# Altium PCB BEAR4.PcbDoc (part 1 of 3)
Units mm, origin at the board's own origin, x right, y up, seen from the top; angles counter-clockwise.
Board outline 83.43 x 40.25 mm, 4 copper layers (Top Layer, Layer 1, Layer 2, Bottom Layer), stack 0.8 mm thick; 156 components, 110 nets, 501 pads, 382 vias.
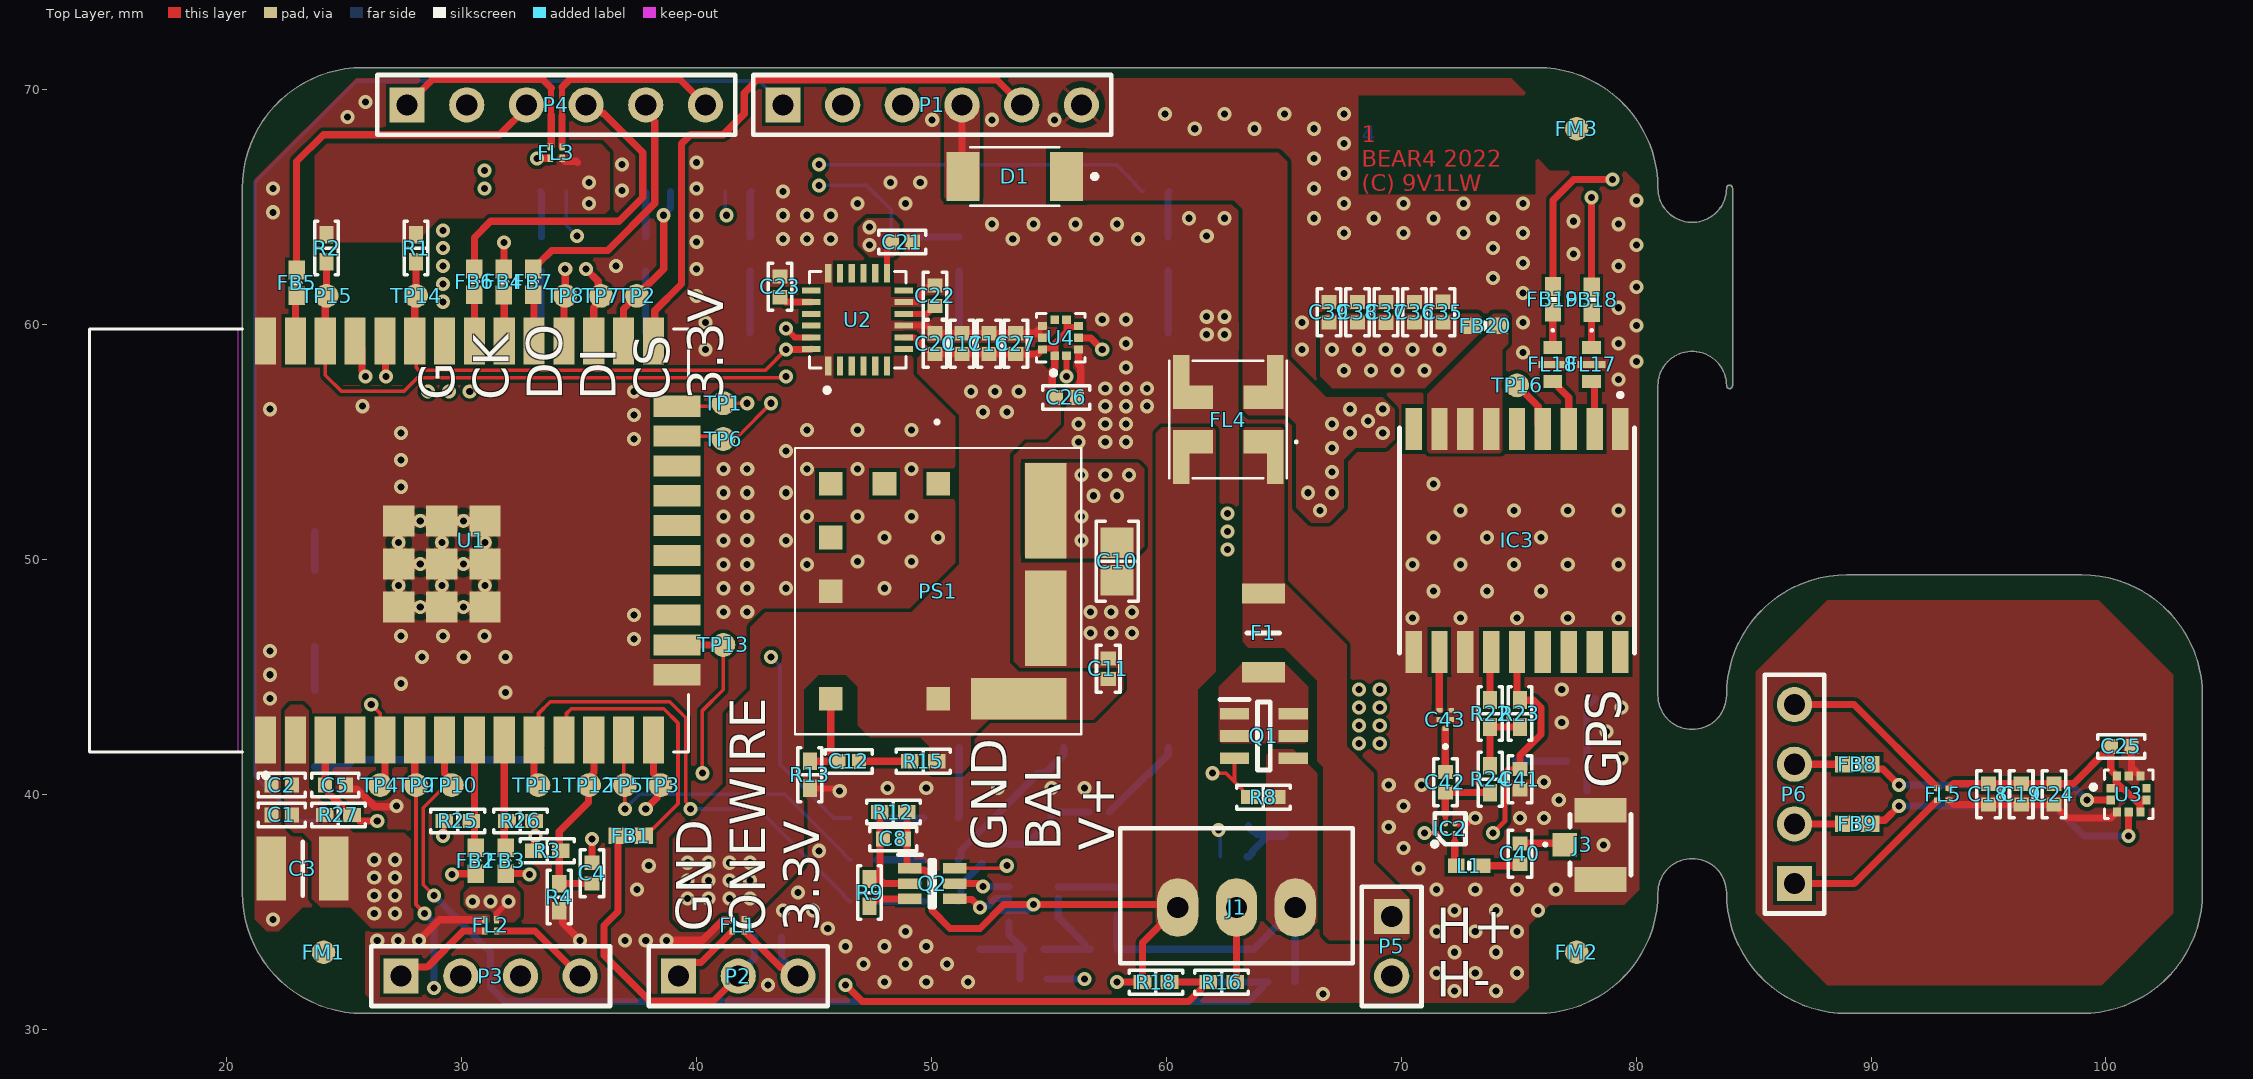
[diagram p0: Top Layer view]
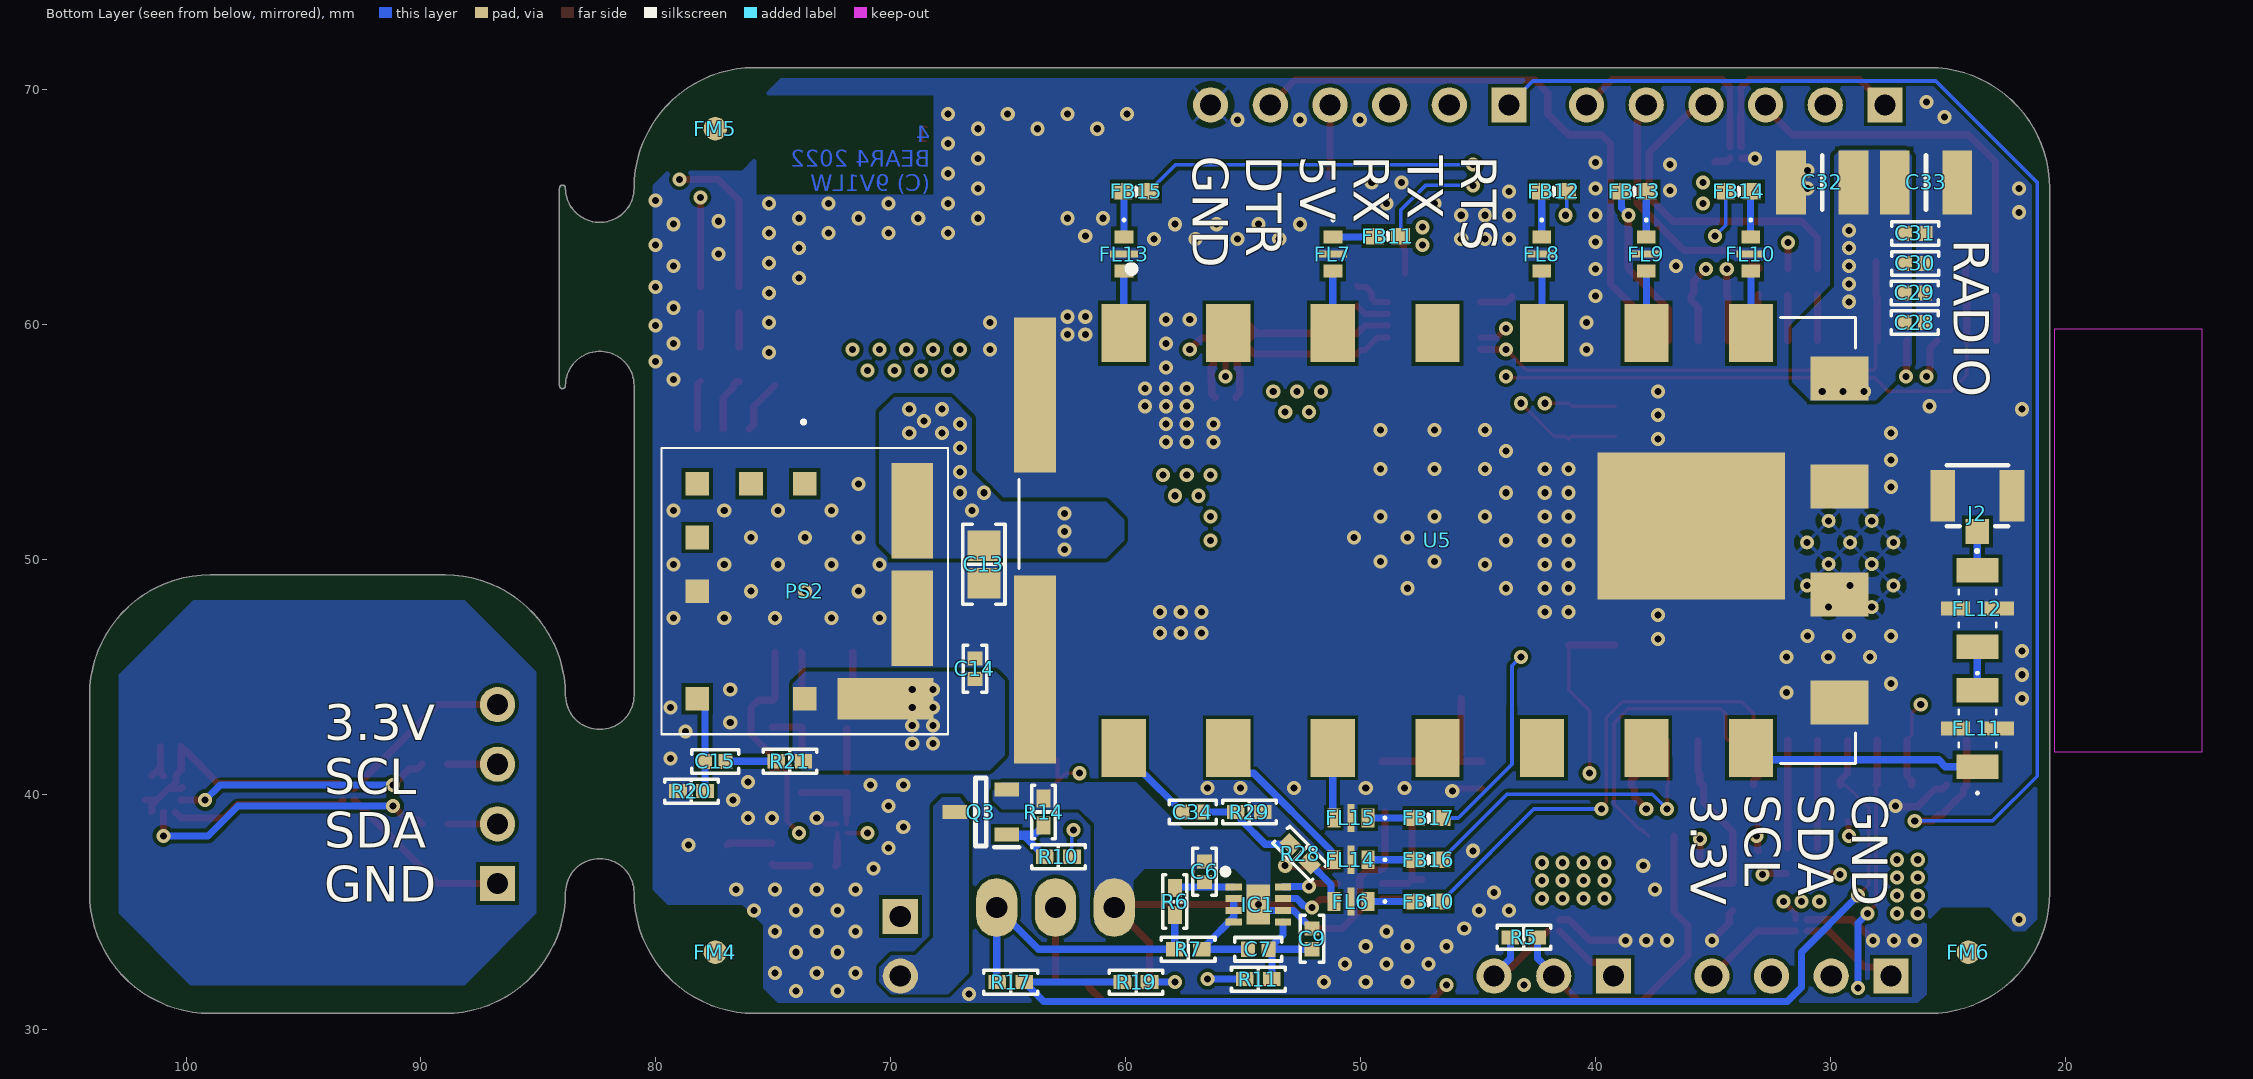
[diagram p1: Bottom Layer view, seen from below]
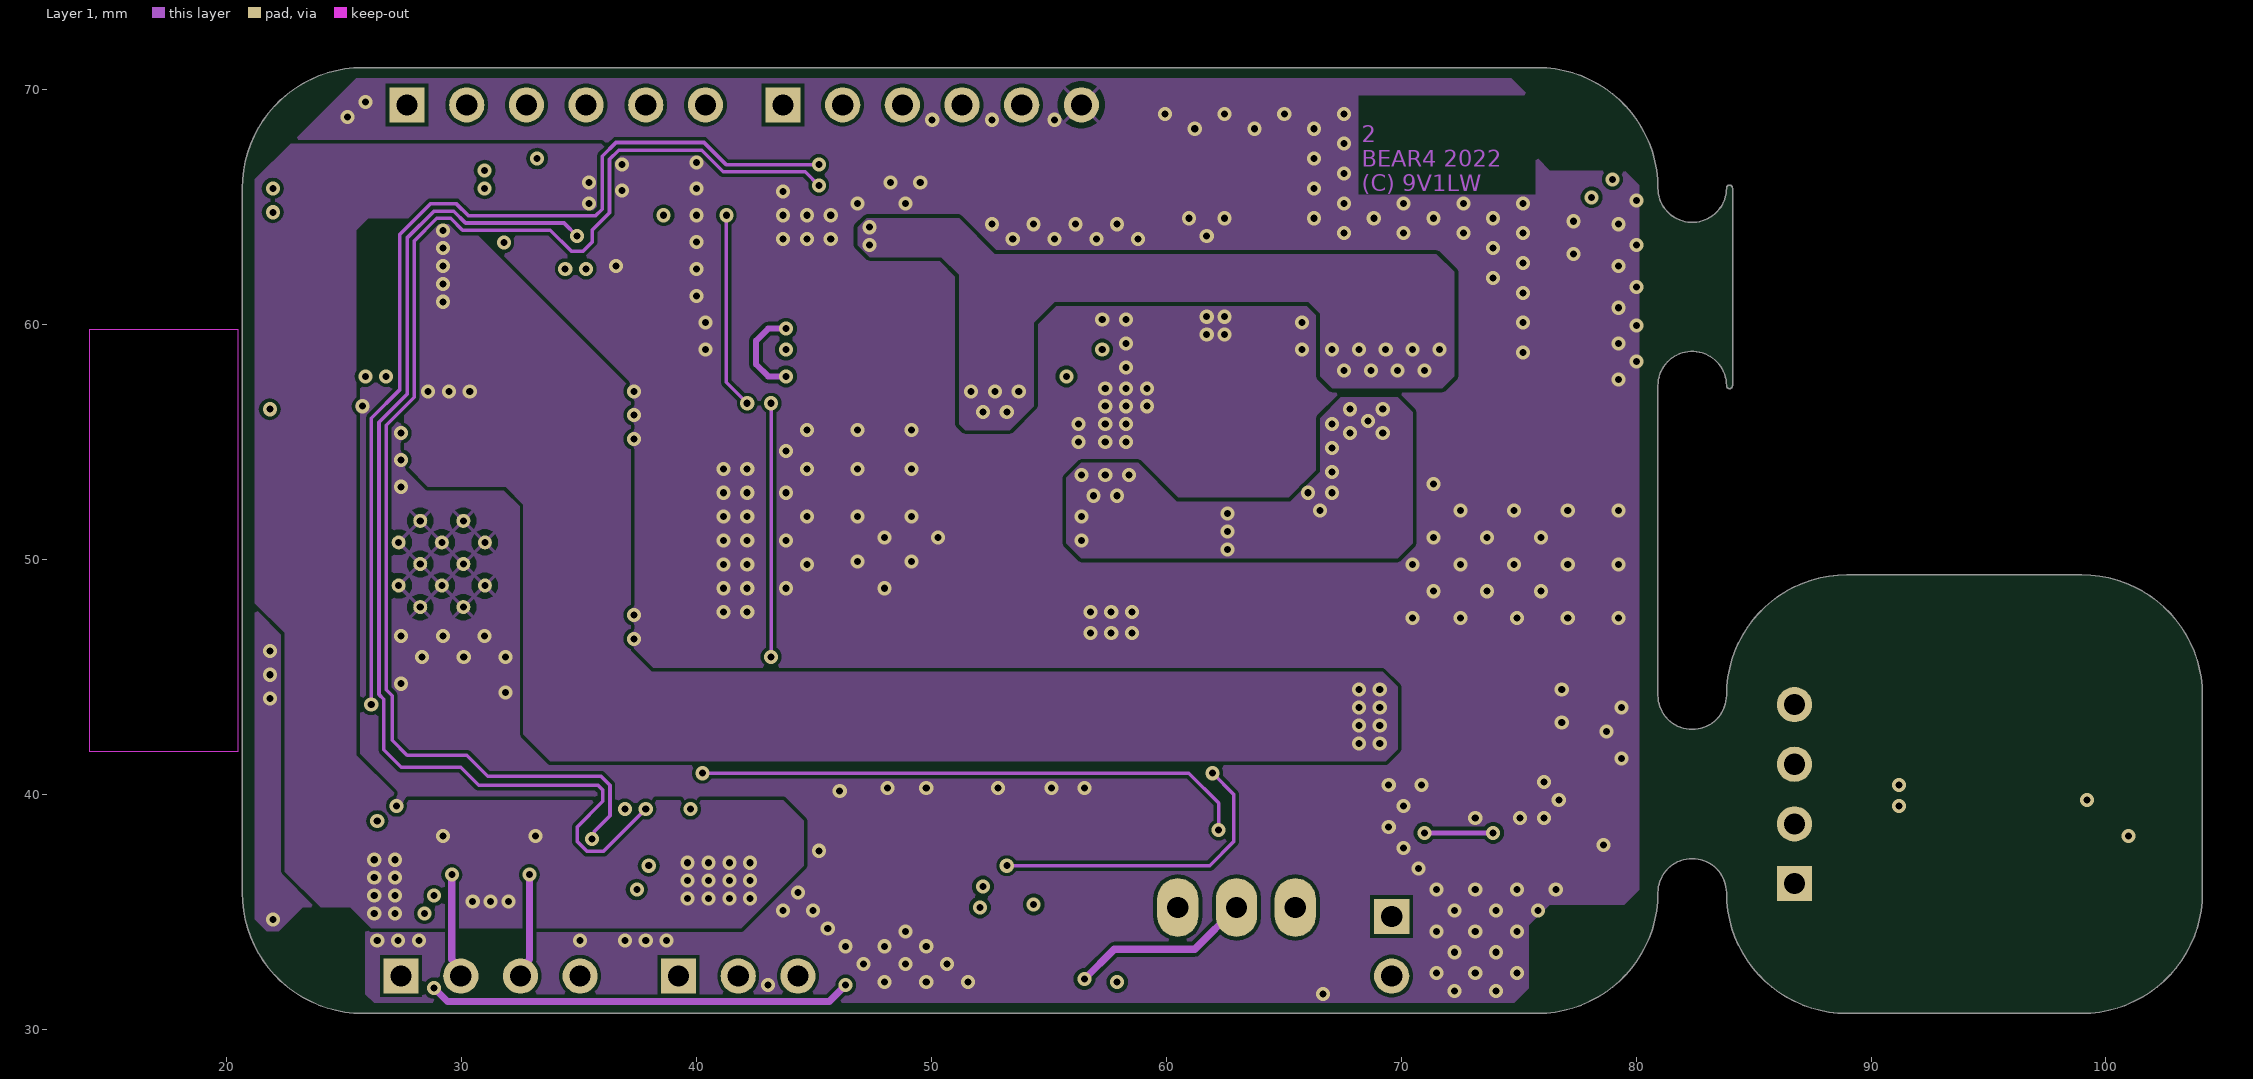
[diagram p2: Layer 1]
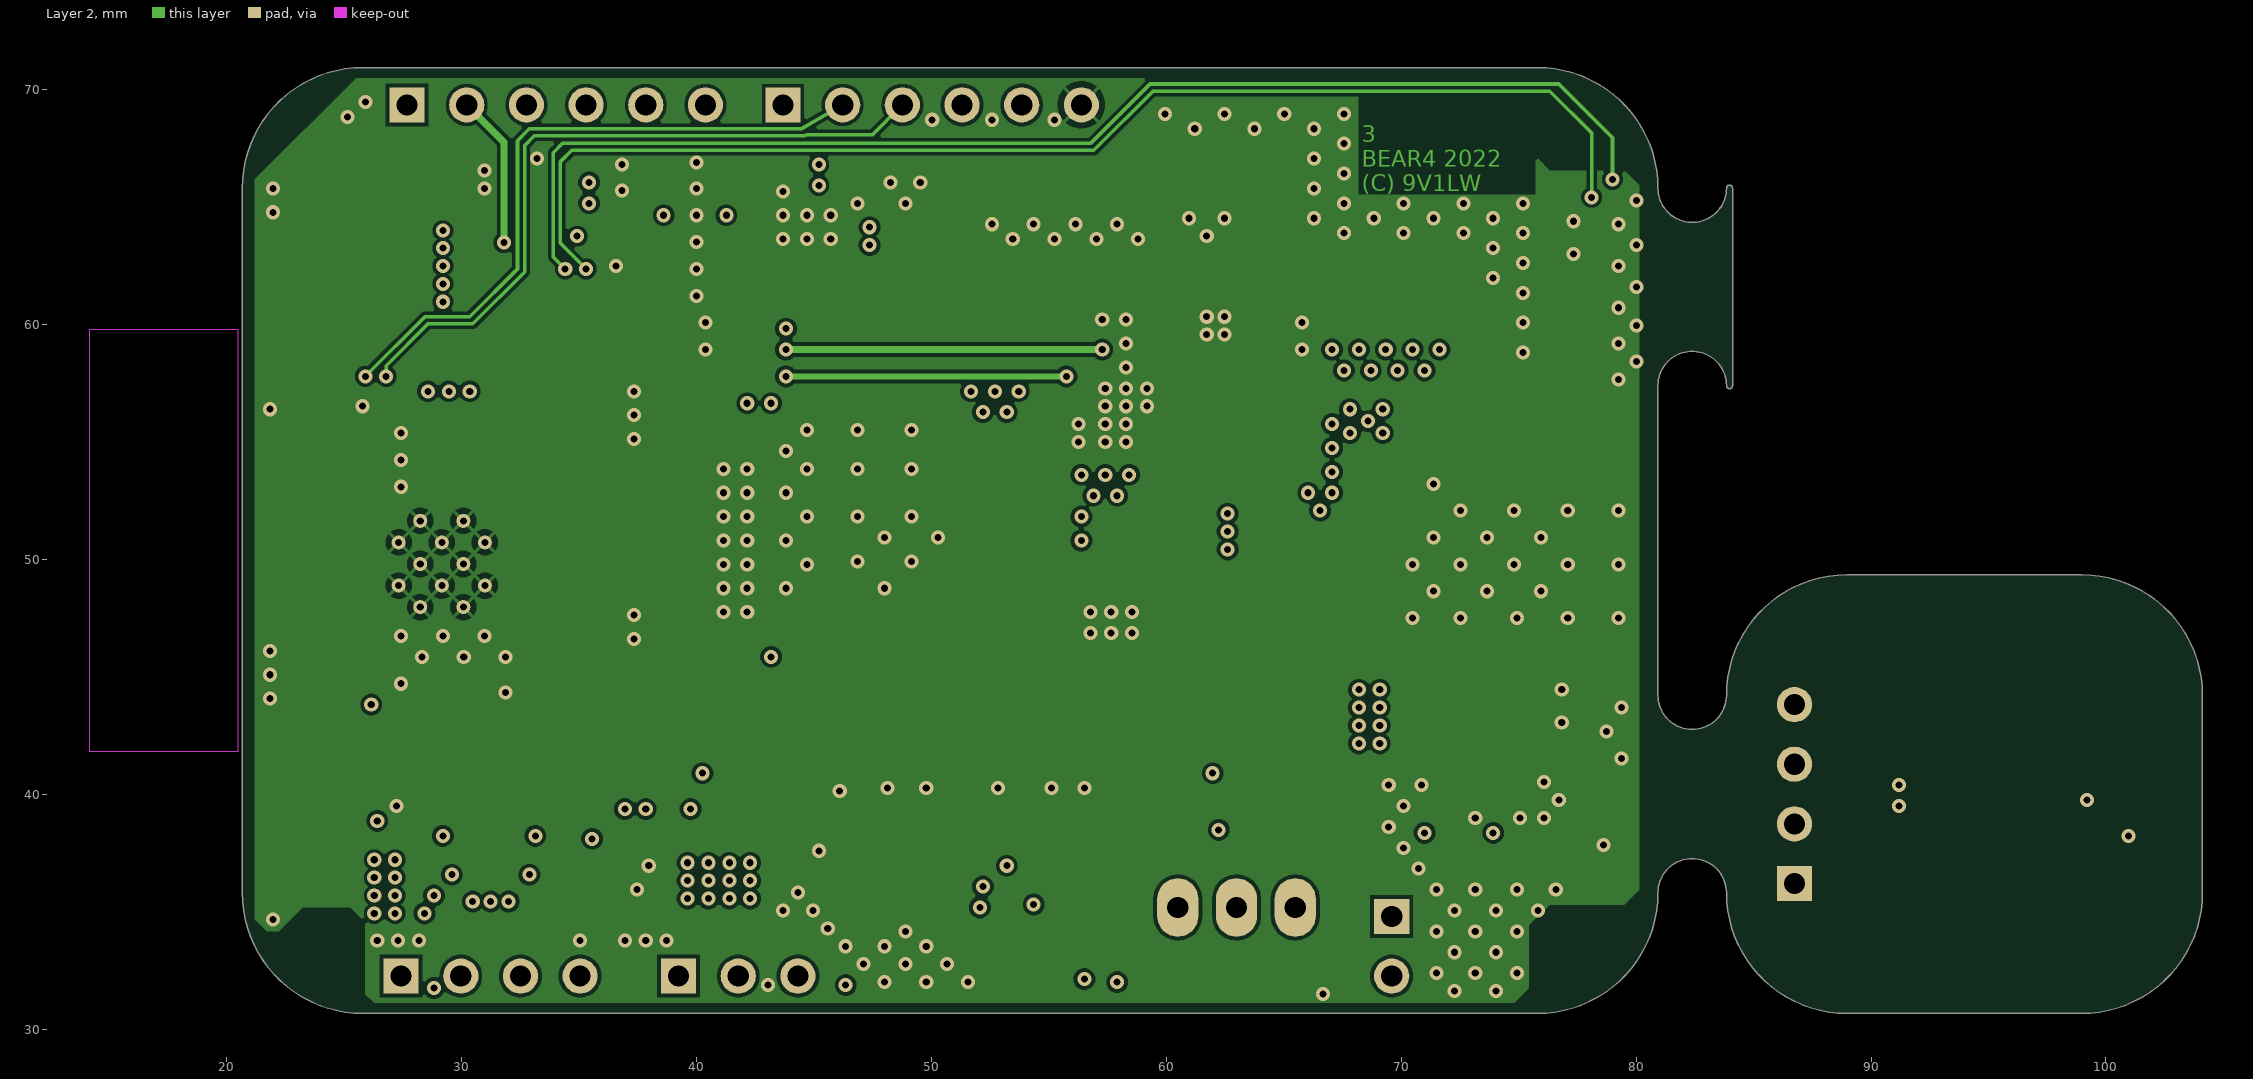
[diagram p3: Layer 2]

## Layer stack, top to bottom
Top Solder: solder mask 0.0102, Solder Resist, Dk 3.5
Top Layer: signal copper 0.035
Dielectric 2: prepreg 0.18, PP-023, Dk 4.29
Layer 1: signal copper 0.035
Dielectric 1: core 0.3, Core-034, Dk 4.6
Layer 2: signal copper 0.035
Dielectric 3: prepreg 0.18, PP-023, Dk 4.29
Bottom Layer: signal copper 0.035
Bottom Solder: solder mask 0.0102, Solder Resist, Dk 3.5

## Board outline
25.8,30.673 cw(c25.8,35.8) 20.673,35.8 20.673,65.8 cw(c25.8,65.8) 25.8,70.927 75.8,70.927 cw(c75.8,65.8) 80.927,65.8 ccw(c82.388,65.8) 83.848,65.8 cw(c83.975,65.8) 84.102,65.8 84.102,57.39 cw(c83.975,57.39) 83.848,57.39 ccw(c82.388,57.39) 80.927,57.39 80.927,44.215 ccw(c82.388,44.215) 83.848,44.212 ccw(c83.816,44.212) 83.848,44.213 cw(c88.975,44.213) 88.975,49.34 98.975,49.34 cw(c98.975,44.212) 104.102,44.212 104.102,35.8 cw(c98.975,35.8) 98.975,30.673 88.975,30.673 cw(c88.975,35.8) 83.848,35.8 cw(c83.975,35.8) 83.848,35.802 ccw(c84.005,35.803) 83.848,35.8 83.848,35.806 cw(c82.386,35.803) 83.848,35.803 ccw(c83.975,35.803) 83.848,35.802 83.848,35.806 ccw(c82.387,35.803) 80.927,35.803 80.927,35.8 ccw(c80.855,35.8) 80.927,35.801 ccw(c80.808,35.803) 80.927,35.803 80.927,35.8 cw(c75.8,35.8) 75.8,30.673

## Design rules (kind name [scope] priority, off if disabled: settings)
BoardOutlineClearance [(NOT OnLayer('Top Overlay')) AND (NOT OnLayer('Bottom Overlay'))] p1: gap=0.35 ignorepadtopadclearanceinfootprint=FALSE
Clearance [All] p1: gap=0.152 ignorepadtopadclearanceinfootprint=TRUE
ComponentClearance ComponentClearance_1 [InComponent('U5') OR InComponent('FL11') OR InComponent('FL12')] p1: gap=0 collisioncheckmode=3 verticalgap=0.254 showdistances=FALSE donotcheckwithout3dbody=TRUE
ComponentClearance [All] p2: gap=0.254 collisioncheckmode=3 verticalgap=0.254 showdistances=FALSE
HoleSize [All] p1: absolutevalues=TRUE maxlimit=6.3 minlimit=0.3 maxpercent=80.000 minpercent=20.000
MinimumAnnularRing [All] p1: minimumring=0.15
MinimumSolderMaskSliver [All] p1: minsoldermaskwidth=0.002
PlaneClearance [All] p1: clearance=1
PlaneConnect [All] p1: pad.planeconnectstyle=Relief pad.reliefexpansion=0.508 pad.reliefentries=4 pad.reliefconductorwidth=0.152 pad.reliefairgap=0.254 via.planeconnectstyle=Direct via.reliefexpansion=0.508 via.reliefentries=4 via.reliefconductorwidth=0.152 via.reliefairgap=0.254
PolygonConnect PolygonConnect_1 [InNet('RAW_PWR') OR InNet('BATT_GND') OR InNet('NetP5_2') OR InNet('BATT_C2') OR InNet('BATT_PROTECTED')] p1: connectstyle=Direct reliefconductorwidth=0.152 reliefentries=4 polygonreliefangle="45 Angle" airgapwidth=0.254
PolygonConnect [All] p2: thpad.connectstyle=Relief thpad.reliefconductorwidth=0.152 thpad.reliefentries=4 thpad.polygonreliefangle="45 Angle" thpad.airgapwidth=0.254 smdpad.connectstyle=Direct smdpad.reliefconductorwidth=0.152 smdpad.reliefentries=4 smdpad.polygonreliefangle="90 Angle" smdpad.airgapwidth=0.254 via.connectstyle=Direct via.reliefconductorwidth=0.254 via.reliefentries=4 via.polygonreliefangle="90 Angle" via.airgapwidth=0.254
RoutingCorners RoutingCorners_1 [InNetClass('Z50Ohm')] p1: cornerstyle=Round minsetback=2.54 maxsetback=2.54
RoutingCorners [All] p2: cornerstyle=45-Degree minsetback=2.54 maxsetback=2.54
RoutingVias [All] p1: holewidth=0.3 width=0.6 viastyle="Through Hole" minholewidth=0.3 minwidth=0.6 maxholewidth=0.3 maxwidth=0.6
SilkToSilkClearance [All] p1: silktosilkclearance=0
SilkToSolderMaskClearance [IsPad] p1: minsilkscreentomaskgap=0 clearancetoexposedcopper=TRUE
SolderMaskExpansion SolderMaskExpansion_1 [IsVia] p1: expansion=0.102 istentingtop=TRUE
SolderMaskExpansion [All] p2: expansion=0.102 istentingtop=FALSE
UnRoutedNet [All] p1: checkbadconnections=TRUE
Width Width_1 [InNetClass('Z50Ohm')] p1: maxlimit=0.318 minlimit=0.152 preferedwidth=0.318 toplayer_minwidth=0.318 midlayer1_maxwidth=0.152 midlayer1_prefwidth=0.152 midlayer2_maxwidth=0.152 midlayer2_prefwidth=0.152 bottomlayer_minwidth=0.318 impedanceprofiledriven=TRUE impedanceprofileid={03A53C15-A395-4E3E-AA58-8DE9AFABB19C} impedanceprofilevalue=50.000000 minimp=50.000000 maximp=50.000000 favimp=50.000000
Width [All] p2: maxlimit=0.305 minlimit=0.152 preferedwidth=0.152
21 further rules are at their usual default settings.

## Classes and differential pairs
net class Z50Ohm: GPS_SIG_AMP GPS_SIG_FILT NetC40_1 NetC40_2 NetC42_1 NetFL11_1 NetFL11_3 NetFL12_3 NetIC2_B1
component class SensorSuite: C16 C17 C18 C19 C20 C21 C22 C23 C24 C25 C26 C27 FB8 FB9 FL5 P6 U2 U3 U4
component class Radio: C28 C29 C30 C31 C32 C33 C34 FB10 FB11 FB12 FB13 FB14 FB15 FB16 FB17 FL6 FL7 FL8 FL9 FL10 FL11 FL12 FL13 FL14 FL15 J2 R28 R29 U5
component class Power: C6 C7 C8 C9 C10 C11 C12 C13 C14 C15 D1 F1 FL4 FM1 FM2 FM3 FM4 FM5 FM6 IC1 J1 P5 PS1 PS2 Q1 Q2 Q3 R6 R7 R8 R9 R10 R11 R12 R13 R14 R15 R16 R17 R18 R19 R20 R21
component class Microcontroller: C1 C2 C3 C4 C5 FB1 FB2 FB3 FB4 FB5 FB6 FB7 FL1 FL2 FL3 P1 P2 P3 P4 R1 R2 R3 R4 R5 R25 R26 R27 TP1 TP2 TP3 TP4 TP5 TP6 TP7 TP8 TP9 TP10 TP11 TP12 TP13 TP14 TP15 U1
component class GPS: C35 C36 C37 C38 C39 C40 C41 C42 C43 FB18 FB19 FB20 FL17 FL18 IC2 IC3 J3 L1 R22 R23 R24 TP16

## Components (designator, comment, footprint, x,y, rotation, side; value= is the part's Value field where it differs from the comment)
C1 "10µF" "CAP 0402_1005" 22.352,39.116 r0 top
C2 "1µF" "CAP 0402_1005" 22.352,40.386 r0 top
C3 "100uF" CAPC3225X270N 23.241,36.83 r180 top
C4 "0.1µF" "CAP 0402_1005" 35.56,36.644 r270 top
C5 "1µF" "CAP 0402_1005" 24.638,40.386 r180 top
C6 "0.1µF" "CAP 0402_1005" 56.642,36.703 r90 bottom
C7 "0.1µF" "CAP 0402_1005" 54.356,33.401 r0 bottom
C8 "0.47µF" "CAP 0402_1005" 48.387,38.1 r180 top
C9 "0.1µF" "CAP 0402_1005" 52.07,33.841 r270 bottom
C10 "22µF" "CAP 0805_2012" 57.912,49.911 r90 top
C11 "10µF" "CAP 0402_1005" 57.531,45.339 r270 top
C12 "0.018µF" "CAP 0402_1005" 46.482,41.402 r180 top
C13 "22µF" "CAP 0805_2012" 66.04,49.784 r90 bottom
C14 "10µF" "CAP 0402_1005" 66.421,45.339 r270 bottom
C15 "0.018µF" "CAP 0402_1005" 77.47,41.402 r0 bottom
C16 "10µF" "CAP 0402_1005" 52.451,59.182 r270 top
C17 "1µF" "CAP 0402_1005" 51.308,59.182 r270 top
C18 "10µF" "CAP 0402_1005" 94.996,40.005 r90 top
C19 "1µF" "CAP 0402_1005" 96.393,40.005 r90 top
C20 "10000pF" "CAP 0402_1005" 50.165,59.182 r270 top
C21 "0.1µF" "CAP 0402_1005" 48.768,63.5 r180 top
C22 "0.1µF" "CAP 0402_1005" 50.165,61.214 r270 top
C23 "2200pF" "CAP 0402_1005" 43.561,61.595 r270 top
C24 "0.1µF" "CAP 0402_1005" 97.79,40.005 r90 top
C25 "0.1µF" "CAP 0402_1005" 100.643,42.037 r180 top
C26 "0.1µF" "CAP 0402_1005" 55.753,56.896 r180 top
C27 "0.1µF" "CAP 0402_1005" 53.594,59.182 r270 top
C28 "10000pF" "CAP 0402_1005" 26.416,60.071 r0 bottom
C29 "0.1µF" "CAP 0402_1005" 26.416,61.341 r0 bottom
C30 "10µF" "CAP 0402_1005" 26.403,62.6 r0 bottom
C31 "1µF" "CAP 0402_1005" 26.403,63.87 r0 bottom
C32 "100uF" CAPC3225X270N 30.353,66.04 r0 bottom
C33 "100uF" CAPC3225X270N 25.935,66.043 r180 bottom
C34 "0.1µF" "CAP 0402_1005" 57.15,39.243 r180 bottom
C35 "0.1µF" "CAP 0402_1005" 71.777,60.52 r270 top
C36 "0.1µF" "CAP 0402_1005" 70.575,60.515 r270 top
C37 "0.1µF" "CAP 0402_1005" 69.361,60.509 r270 top
C38 "10µF" "CAP 0402_1005" 68.148,60.515 r270 top
C39 "1µF" "CAP 0402_1005" 66.929,60.511 r270 top
C40 "0.1µF" "CAP 0402_1005" 75.057,37.465 r270 top
C41 "10pF" "CAP 0402_1005" 75.057,40.64 r90 top
C42 "0.1µF" "CAP 0402_1005" 71.882,40.513 r270 top
C43 "F6QA1G581M2QZ-J" F6QA1G581M2QZJ 71.882,43.18 r90 top
D1 "PMEG3050EP,115" PMEG3050EP115 53.553,66.294 r180 top
F1 "MF-NSML350_12-2" FUSC3216X140N 64.135,46.863 r90 top
FB1 "MFBM1V1005-102-R" BEADC1005X65N 37.211,38.227 r180 top
FB2 "MFBM1V1005-102-R" BEADC1005X65N 30.608,37.168 r270 top
FB3 "MFBM1V1005-102-R" BEADC1005X65N 31.877,37.169 r270 top
FB4 "MFBM1V1005-102-R" BEADC1005X65N 31.805,61.805 r90 top
FB5 "MFBM1V1005-102-R" BEADC1005X65N 22.984,61.764 r90 top
FB6 "MFBM1V1005-102-R" BEADC1005X65N 30.553,61.811 r90 top
FB7 "MFBM1V1005-102-R" BEADC1005X65N 33.058,61.811 r90 top
FB8 "MFBM1V1005-102-R" BEADC1005X65N 89.408,41.275 r0 top
FB9 "MFBM1V1005-102-R" BEADC1005X65N 89.408,38.735 r0 top
FB10 "MFBM1V1005-102-R" BEADC1005X65N 47.117,35.433 r0 bottom
FB11 "MFBM1V1005-102-R" BEADC1005X65N 48.853,63.754 r0 bottom
FB12 "MFBM1V1005-102-R" BEADC1005X65N 41.783,65.659 r0 bottom
FB13 "MFBM1V1005-102-R" BEADC1005X65N 38.354,65.659 r180 bottom
FB14 "MFBM1V1005-102-R" BEADC1005X65N 33.909,65.659 r180 bottom
FB15 "MFBM1V1005-102-R" BEADC1005X65N 59.563,65.659 r0 bottom
FB16 "MFBM1V1005-102-R" BEADC1005X65N 47.117,37.211 r0 bottom
FB17 "MFBM1V1005-102-R" BEADC1005X65N 47.117,38.989 r0 bottom
FB18 "MFBM1V1005-102-R" BEADC1005X65N 78.105,61.045 r270 top
FB19 "MFBM1V1005-102-R" BEADC1005X65N 76.462,61.061 r270 top
FB20 "MFBM1V1005-102-R" BEADC1005X65N 73.575,59.944 r0 top
FL1 "TCM0605M-650-2P-T201" TCM0605M 41.783,34.417 r0 top
FL2 "TCM0605M-650-2P-T201" TCM0605M 31.242,34.417 r0 top
FL3 "TCM0605M-650-2P-T201" TCM0605M 34.036,67.31 r180 top
FL4 "DLW5ATN112MQ2L" DLW5BSN302SQ2L 62.86,55.946 r270 top
FL5 "TCM0605M-650-2P-T201" TCM0605M 93.077,40.001 r270 top
FL6 "MEM1608P35R0T001" MEM1608P35R0T001 50.419,35.433 r0 bottom
FL7 "MEM1608P35R0T001" MEM1608P35R0T001 51.181,62.992 r270 bottom
FL8 "MEM1608P35R0T001" MEM1608P35R0T001 42.291,62.992 r270 bottom
FL9 "MEM1608P35R0T001" MEM1608P35R0T001 37.846,62.992 r270 bottom
FL10 "MEM1608P35R0T001" MEM1608P35R0T001 33.401,62.992 r270 bottom
FL11 "LFCN-160+" LFCN160 23.749,42.799 r90 bottom
FL12 "LFCN-160+" LFCN160 23.749,47.905 r90 bottom
FL13 "MEM1608P35R0T001" MEM1608P35R0T001 60.071,62.992 r270 bottom
FL14 "MEM1608P35R0T001" MEM1608P35R0T001 50.419,37.211 r0 bottom
FL15 "MEM1608P35R0T001" MEM1608P35R0T001 50.419,38.989 r0 bottom
FL17 "MEM1608P35R0T001" MEM1608P35R0T001 78.105,58.293 r270 top
FL18 "MEM1608P35R0T001" MEM1608P35R0T001 76.454,58.293 r270 top
FM1 "1mm" FIDUCIAL_MARK_ROUND 24.13,33.274 r0 top locked
FM2 "1mm" FIDUCIAL_MARK_ROUND 77.47,33.274 r0 top locked
FM3 "1mm" FIDUCIAL_MARK_ROUND 77.47,68.326 r0 top locked
FM4 "1mm" FIDUCIAL_MARK_ROUND 77.47,33.274 r180 bottom locked
FM5 "1mm" FIDUCIAL_MARK_ROUND 77.47,68.326 r180 bottom locked
FM6 "1mm" FIDUCIAL_MARK_ROUND 24.13,33.274 r180 bottom locked
IC1 "BQ296106DSGT" SON50P200X200X80-9N 54.356,35.306 r180 bottom
IC2 "MAX2693LEWS+T" BGA4C40P2X2_84X84X69 72.082,38.535 r90 top
IC3 "MAX-M8Q-0-10" MAX-M8 74.93,50.8 r90 top
J1 "B3B-XH-A(LF)(SN)" "JST XH B3B-XH-A" 62.992,35.179 r180 top
J2 "CONUFL001-SMD-T" CONUFL001-SMD 23.749,52.706 r180 bottom
J3 "CONUFL001-SMD-T" CONUFL001-SMD 78.486,37.846 r270 top
L1 "12nH" INDC1005X55N 72.898,36.957 r0 top
P1 "Header 6" HDR1X6 43.688,69.342 r0 top
P2 "Header 3" HDR1X3 39.243,32.258 r0 top
P3 "Header 4" HDR1X4 27.432,32.258 r0 top
P4 "Header 6" HDR1X6 27.686,69.342 r0 top
P5 "Header 2" HDR1X2 69.596,34.798 r270 top
P6 "Header 4" HDR1X4 86.741,36.195 r90 top
PS1 "APXS003A0X-SRZ" APTH003A0XSRZ 50.292,48.641 r270 top
PS2 "APXS003A0X-SRZ" APTH003A0XSRZ 73.663,48.643 r270 bottom
Q1 "PMN30XPAX" SOT95P275X110-6N 64.155,42.479 r0 top
Q2 "PMGD290UCEAX" SOT65P210X110-6N 50.038,36.195 r0 top
Q3 "PMV37ENEAR" SOT95P230X110-3N 66.167,39.243 r0 bottom
R1 "4.7 kOhms" "RES 0402_1005" 28.067,63.246 r90 top
R2 "4.7 kOhms" "RES 0402_1005" 24.257,63.246 r90 top
R3 "100 kOhms" "RES 0402_1005" 33.655,37.592 r180 top
R4 "100 kOhms" "RES 0402_1005" 34.163,35.62 r90 top
R5 "4.7 kOhms" "RES 0402_1005" 43.053,33.909 r180 bottom
R6 "100 Ohms" "RES 0402_1005" 57.912,35.433 r270 bottom
R7 "1 kOhms" "RES 0402_1005" 57.344,33.401 r180 bottom
R8 "10 kOhms" "RES 0402_1005" 64.135,39.878 r180 top
R9 "6.8 Ohms" "RES 0402_1005" 47.371,35.814 r270 top
R10 "1 kOhms" "RES 0402_1005" 62.865,37.338 r0 bottom
R11 "1 kOhms" "RES 0402_1005" 54.356,32.131 r180 bottom
R12 "10 kOhms" "RES 0402_1005" 48.387,39.243 r0 top
R13 "2.2 kOhms" "RES 0402_1005" 44.831,40.827 r90 top
R14 "10 kOhms" "RES 0402_1005" 63.5,39.243 r90 bottom
R15 "100 Ohms" "RES 0402_1005" 49.657,41.402 r180 top
R16 "4.7 kOhms" "RES 0402_1005" 62.357,32.004 r0 top
R17 "10 kOhms" "RES 0402_1005" 64.897,32.004 r180 bottom
R18 "10 kOhms" "RES 0402_1005" 59.563,32.004 r180 top
R19 "4.7 kOhms" "RES 0402_1005" 59.563,32.004 r0 bottom
R20 "2.2 kOhms" "RES 0402_1005" 78.486,40.132 r0 bottom
R21 "100 Ohms" "RES 0402_1005" 74.295,41.402 r0 bottom
R22 "=Value" "RES 0402_1005" 73.787,43.434 r90 top
R23 "=Value" "RES 0402_1005" 75.057,43.434 r270 top
R24 "25.5 kOhms" "RES 0402_1005" 73.787,40.64 r90 top
R25 "4.7 kOhms" "RES 0402_1005" 29.845,38.862 r180 top
R26 "4.7 kOhms" "RES 0402_1005" 32.512,38.862 r0 top
R27 "10 kOhms" "RES 0402_1005" 24.765,39.116 r0 top
R28 "2.2 kOhms" "RES 0402_1005" 52.578,37.465 r45 bottom
R29 "6.8 Ohms" "RES 0402_1005" 54.737,39.243 r0 bottom
TP1 "Testpoint1" Testpoint1 41.148,56.642 r90 top
TP2 "Testpoint1" Testpoint1 37.465,61.214 r90 top
TP3 "Testpoint1" Testpoint1 38.481,40.386 r90 top
TP4 "Testpoint1" Testpoint1 26.543,40.386 r90 top
TP5 "Testpoint1" Testpoint1 36.957,40.386 r90 top
TP6 "Testpoint1" Testpoint1 41.148,55.118 r90 top
TP7 "Testpoint1" Testpoint1 35.941,61.214 r90 top
TP8 "Testpoint1" Testpoint1 34.417,61.214 r90 top
TP9 "Testpoint1" Testpoint1 28.067,40.386 r90 top
TP10 "Testpoint1" Testpoint1 29.591,40.386 r90 top
TP11 "Testpoint1" Testpoint1 33.274,40.386 r90 top
TP12 "Testpoint1" Testpoint1 35.433,40.386 r90 top
TP13 "Testpoint1" Testpoint1 41.148,46.355 r90 top
TP14 "Testpoint1" Testpoint1 28.067,61.214 r90 top
TP15 "Testpoint1" Testpoint1 24.257,61.214 r90 top
TP16 "Testpoint1" Testpoint1 74.93,57.404 r90 top
U1 "ESP32-WROOM-32D" MODULE_ESP32-WROOM-32D 26.924,50.8 r90 top
U2 "MPU-6050" QFN50P400X400X95-24N 46.863,60.198 r90 top
U3 "BMP388" PQFN50P200X200X80-10N 100.965,40.005 r0 top
U4 "BMP388" PQFN50P200X200X80-10N 55.503,59.433 r90 top
U5 "DRA818V" DORJI_DRA818V 46.736,50.8 r180 bottom

## Footprints (in the part's own frame and the unit in brackets; to place one, negate y for a bottom-side part, rotate by r counter-clockwise, add the part's x,y. Pads: shape width x height; smd on the part's side, far side on the other; paste and mask are expansions set on the pad)
APTH003A0XSRZ [mm]
  rect 1.01x1.01 smd: 1(-4.575,0.005) 5(4.575,0.005) 6(4.575,-4.575) 7(0.005,-4.575) 8(-2.285,-4.575) 9(-4.575,-4.575) 10(-4.575,-2.285)
  rect 4.07x1.77 smd: 2(-3.425,4.575) 3(1.145,4.575)
  rect 1.77x4.07 smd: 4(4.575,3.435)
  silkscreen extent -7.25,-6.09 6.09,6.09, body extent -6.09,-6.09 6.09,6.09, height 6.5
BEADC1005X65N [mm]
  rect 0.8x0.7 smd: 1(-0.55,0) 2(0.55,0)
  silkscreen extent 0,-0.15 0,0.15, body extent -0.5,-0.25 0.5,0.25, height 0.65
BGA4C40P2X2_84X84X69 [mm]
  round 0.216 smd: A1(-0.2,0.2) A2(0.2,0.2) B1(-0.2,-0.2) B2(0.2,-0.2)
  silkscreen extent -0.76,-0.66 0.66,0.76, body extent -0.42,-0.42 0.42,0.42, height 0.69
"CAP 0402_1005" [mm] "Chip Capacitor, 2-Leads, Body 1.02x0.51mm, IPC Medium Density"
  rect 0.6x0.64 smd: 1(-0.44,0) 2(0.44,0)
  silkscreen extent -1,-0.5 1,0.5, body extent -0.5,-0.26 0.5,0.26, height 0.52
"CAP 0805_2012" [mm] "Chip Capacitor, 2-Leads, Body 2.00x1.20mm, IPC Medium Density"
  rect 1.3x1.4 smd: 1(-0.8,0) 2(0.8,0)
  silkscreen extent -1.7,-0.9 1.7,0.9, body extent -1,-0.64 1,0.64, height 1.26
CAPC3225X270N [mm]
  rect 1.26x2.72 smd: 1(-1.33,0) 2(1.33,0)
  silkscreen extent 0,-1.15 0,1.15, body extent -1.6,-1.25 1.6,1.25, height 2.7
CONUFL001-SMD [mm]
  rect 1x1.05 smd: 1(0,-1.525)
  rect 1.05x2.2 smd: 2(-1.475,0) 3(1.475,0)
  silkscreen extent -1.3,-2.38 1.3,1.3, body extent -1.5,-1.5 1.5,1.59, height 1.25
DLW5BSN302SQ2L [mm]
  rect 1x1.7 smd: 1(0.95,1.275) 2(-0.95,1.275) 3(-0.95,-1.725) 4(0.95,-1.725)
  rect 1.3x0.7 smd: 5(2.1,1.775) 6(-2.1,1.775) 7(-2.1,-2.225) 8(2.1,-2.225)
  silkscreen extent -2.5,-2.73 2.5,2.72, body extent -2.5,-1.8 2.5,1.8, height 2.35
DORJI_DRA818V [mm]
  rect 1.88x2.47 smd: 1(-13.35,8.825) 2(-8.9,8.825) 3(-4.45,8.825) 4(0,8.825) 5(4.45,8.825) 6(8.9,8.825) 7(13.35,8.825) 12(13.35,-8.825) 13(8.9,-8.825) 14(4.45,-8.825) 15(0,-8.825) 16(-4.45,-8.825) 17(-8.9,-8.825) 18(-13.35,-8.825)
  rect 2.47x1.88 smd: 8(17.125,6.9) 9(17.125,2.3) 10(17.125,-2.3) 11(17.125,-6.9)
  rect 7.99x6.254 smd paste-0.254 mask+0: P1(10.805,0.623)
  rect 1.8x6.6 smd: P2(-17.125,6.2)
  rect 1.8x8 smd: P3(-17.125,-5.5)
  silkscreen extent -17.8,-9.5 17.8,11.71
F6QA1G581M2QZJ [mm]
  rect 0.2x0.25 smd: 1(-0.395,0) 2(0,-0.25) 3(0.395,-0.25) 4(0.395,0.25) 5(0,0.25)
  silkscreen extent -1.2,-0.05 -1.1,0.05, body extent -0.55,-0.45 0.55,0.45, height 0.6
FIDUCIAL_MARK_ROUND [mm] "fiducial mark, round, 1 mm diameter, 3 mm keep-out"
  round 1 smd paste-1 mask+1: FD0(0,0)
FUSC3216X140N [mm]
  rect 0.86x1.82 smd: 1(-1.675,0) 2(1.675,0)
  silkscreen extent 0,-0.7 0,0.7, body extent -1.63,-0.8 1.63,0.8, height 1.4
HDR1X2 [mm] "Connector; Header; 2 Position"
  rect 1.5x1.5 hole 0.9: 1(0,0)
  round 1.5 hole 0.9: 2(2.54,0)
  silkscreen extent -1.27,-1.27 3.81,1.27
HDR1X3 [mm] "Connector; Header; 3 Position"
  rect 1.5x1.5 hole 0.9: 1(0,0)
  round 1.5 hole 0.9: 2(2.54,0) 3(5.08,0)
  silkscreen extent -1.27,-1.27 6.35,1.27
HDR1X4 [mm] "Connector; Header; 4 Position"
  rect 1.5x1.5 hole 0.9: 1(0,0)
  round 1.5 hole 0.9: 2(2.54,0) 3(5.08,0) 4(7.62,0)
  silkscreen extent -1.27,-1.27 8.89,1.27
HDR1X6 [mm] "Connector; Header; 6 Position"
  rect 1.5x1.5 hole 0.9: 1(0,0)
  round 1.5 hole 0.9: 2(2.54,0) 3(5.08,0) 4(7.62,0) 5(10.16,0) 6(12.7,0)
  silkscreen extent -1.27,-1.27 13.97,1.27
INDC1005X55N [mm]
  rect 0.7x0.6 smd: 1(-0.55,0) 2(0.55,0)
  silkscreen extent 0,-0.15 0,0.15, body extent -0.5,-0.25 0.5,0.25, height 0.55
"JST XH B3B-XH-A" [mm]
  oval 1.75x2.5 hole 0.9: 1(-2.5,0) 2(0,0) 3(2.5,0)
  silkscreen extent -4.95,-3.38 4.95,2.38, body extent -4.95,-3.38 4.95,2.38, height 7
LFCN160 [mm]
  rect 1.04x1.8 smd: 1(-1.625,0) 3(1.625,0)
  rect 0.61x1.245 smd: 2(0,-0.927) 4(0,0.928)
  silkscreen extent -2.8,-0.8 0.8,0.8
MAX-M8 [mm]
  rect 1.8x0.7 smd: 1(4.75,-4.4) 2(4.75,-3.3) 3(4.75,-2.2) 4(4.75,-1.1) 5(4.75,0) 6(4.75,1.1) 7(4.75,2.2) 8(4.75,3.3) 9(4.75,4.4) 10(-4.75,4.4) 11(-4.75,3.3) 12(-4.75,2.2) 13(-4.75,1.1) 14(-4.75,0) 15(-4.75,-1.1) 16(-4.75,-2.2) 17(-4.75,-3.3) 18(-4.75,-4.4)
  silkscreen extent -4.8,-5 6.27,5, body extent -4.85,-5.05 4.85,5.05, height 2.7
MEM1608P35R0T001 [mm]
  rect 0.55x0.8 smd: 1(-0.725,0) 3(0.725,0)
  rect 0.3x1.2 smd: 4(0,0)
  silkscreen extent -1.5,-0.05 -1.4,0.05, body extent -0.94,-0.57 0.94,0.57, height 0.8
MODULE_ESP32-WROOM-32D [mm]
  rect 2x0.9 smd: 1(-8.5,5.26) 2(-8.5,3.99) 3(-8.5,2.72) 4(-8.5,1.45) 5(-8.5,0.18) 6(-8.5,-1.09) 7(-8.5,-2.36) 8(-8.5,-3.63) 9(-8.5,-4.9) 10(-8.5,-6.17) 11(-8.5,-7.44) 12(-8.5,-8.71) 13(-8.5,-9.98) 14(-8.5,-11.25) 25(8.5,-11.25) 26(8.5,-9.98) 27(8.5,-8.71) 28(8.5,-7.44) 29(8.5,-6.17) 30(8.5,-4.9) 31(8.5,-3.63) 32(8.5,-2.36) 33(8.5,-1.09) 34(8.5,0.18) 35(8.5,1.45) 36(8.5,2.72) 37(8.5,3.99) 38(8.5,5.26)
  rect 0.9x2 smd: 15(-5.715,-12.25) 16(-4.445,-12.25) 17(-3.175,-12.25) 18(-1.905,-12.25) 19(-0.635,-12.25) 20(0.635,-12.25) 21(1.905,-12.25) 22(3.175,-12.25) 23(4.445,-12.25) 24(5.715,-12.25)
  rect 1.33x1.33 smd: 39_1(-2.835,-0.405) 39_2(-1,-0.405) 39_3(0.835,-0.405) 39_4(-2.835,-2.24) 39_5(-1,-2.24) 39_6(0.835,-2.24) 39_7(-2.835,-4.075) 39_8(-1,-4.075) 39_9(0.835,-4.075)
  round 0.6 hole 0.3: 39_10(-1.917,-0.405) 39_11(-0.082,-0.405) 39_12(-2.835,-1.322) 39_13(-1,-1.322) 39_14(0.835,-1.322) 39_15(-1.917,-2.24) 39_16(-0.082,-2.24) 39_17(-2.835,-3.157) 39_18(-1,-3.157) 39_19(0.835,-3.157) 39_20(-1.917,-4.075) 39_21(-0.082,-4.075)
  Keep-Out Layer region: 9,6.45 -9,6.45 -9,12.75 9,12.75
  Keep-Out Layer region: 9,6.45 -9,6.45 -9,12.75 9,12.75
  silkscreen extent -10.1,-12.75 9,12.75, body extent -9,-12.75 9,12.75, height 3.25
PMEG3050EP115 [mm]
  rect 1.4x2.1 smd: 1(-2.2,0) 2(2.2,0)
  silkscreen extent -3.5,-1.25 1.9,1.25, body extent -2.33,-1.34 2.37,1.26, height 1.08
PQFN50P200X200X80-10N [mm]
  rrect9% 0.35x0.38 smd: 1(-0.765,0.25) 2(-0.765,-0.25) 3(-0.5,-0.765) 4(0,-0.765) 5(0.5,-0.765) 6(0.765,-0.25) 7(0.765,0.25) 8(0.5,0.765) 9(0,0.765) 10(-0.5,0.765)
  silkscreen extent -1.6,-1.03 1.03,1.03, body extent -1,-1 1,1, height 0.8
QFN50P400X400X95-24N [mm]
  rect 0.79x0.26 smd: 1(-1.97,1.25) 2(-1.97,0.75) 3(-1.97,0.25) 4(-1.97,-0.25) 5(-1.97,-0.75) 6(-1.97,-1.25) 13(1.97,-1.25) 14(1.97,-0.75) 15(1.97,-0.25) 16(1.97,0.25) 17(1.97,0.75) 18(1.97,1.25)
  rect 0.26x0.79 smd: 7(-1.25,-1.97) 8(-0.75,-1.97) 9(-0.25,-1.97) 10(0.25,-1.97) 11(0.75,-1.97) 12(1.25,-1.97) 19(1.25,1.97) 20(0.75,1.97) 21(0.25,1.97) 22(-0.25,1.97) 23(-0.75,1.97) 24(-1.25,1.97)
  silkscreen extent -3.1,-2.05 2.05,2.05, body extent -2,-2 2,2, height 0.93
"RES 0402_1005" [mm] "Chip Resistor, 2-Leads, Body 1.0x0.5mm, IPC Medium Density"
  rect 0.75x0.6 smd: 1(-0.575,0) 2(0.575,0)
  silkscreen extent -1.14,-0.51 1.14,0.51, body extent -0.5,-0.25 0.5,0.25, height 0.35
SON50P200X200X80-9N [mm]
  rect 0.7x0.3 smd: 1(-1.05,0.75) 2(-1.05,0.25) 3(-1.05,-0.25) 4(-1.05,-0.75) 5(1.05,-0.75) 6(1.05,-0.25) 7(1.05,0.25) 8(1.05,0.75)
  rect 1x1.7 smd: 9(0,0)
  silkscreen extent -1.53,1.28 -1.28,1.52, body extent -1,-1 1,1, height 0.77
SOT65P210X110-6N [mm]
  rect 1x0.45 smd: 1(-0.95,0.65) 2(-0.95,0) 3(-0.95,-0.65) 4(0.95,-0.65) 5(0.95,0) 6(0.95,0.65)
  silkscreen extent -1.45,-1 0.1,1.22, body extent -1.05,-1.09 1.05,1.06, height 0.95
SOT95P230X110-3N [mm]
  rect 1.05x0.6 smd: 1(-1.1,0.95) 2(-1.1,-0.95) 3(1.1,0)
  silkscreen extent -1.63,-1.45 0.23,1.5, body extent -1.15,-1.45 1.15,1.45, height 1.1
SOT95P275X110-6N [mm]
  rect 1.25x0.5 smd: 1(-1.25,0.95) 2(-1.25,0) 3(-1.25,-0.95) 4(1.25,-0.95) 5(1.25,0) 6(1.25,0.95)
  silkscreen extent -1.88,-1.45 0.28,1.55, body extent -1.38,-1.45 1.38,1.45, height 1.1
TCM0605M [mm]
  rect 0.23x0.3 smd: 1(-0.25,-0.24) 2(0.25,-0.24) 3(0.25,0.24) 4(-0.25,0.24)
  body extent -0.34,-0.37 0.34,0.37, height 0.45
Testpoint1 [mil]
  round 40 smd: 1(0,0)

## Part data
C1 C11 C14 C16 C18 C30 C38: library part C0402C106M9PAC7867, "CAP CER 10UF 6.3V X5R 0402", Device Package="0402 (1005 Metric)", Manufacturer=KEMET, Operating Temperature="-55°C ~ 85°C", Supplier Part Number 1=399-13069-1-ND, Temperature Coefficient=X5R, Tolerance=±20%, Voltage - Rated=6.3V, Applications="General Purpose", Capacitance=10µF, ComponentLink1Description=Datasheet, ComponentLink1URL=https://api.kemet.com/component-edge/download/datasheet/C0402C106M9PAC7867.pdf, ComponentLink2Description="DigiKey Link", ComponentLink2URL=http://digikey.com/product-detail/en/kemet/C0402C106M9PAC7867/399-13069-1-ND/5767556, LastUpdated="2/9/2020 1:02:21 AM", Lifecycle Status=Active, Minimum Order=1, Mounting Type="Surface Mount, MLCC", Package / Case="0402 (1005 Metric)", Packaging=TapeAndReel, Part Number=C0402C106M9PAC7867, Part Status=Active, PartId=3087, Price=0.13, Series="SMD Comm X5R", Size / Dimension="0.039\" L x 0.020\" W (1.00mm x 0.50mm)", Supplier 1=DigiKey, Thickness (Max)="0.028\" (0.70mm)"
C2 C5 C17 C19 C31 C39: library part 0402YD105KAT2A, "CAP CER 1UF 16V X5R 0402", Device Package="0402 (1005 Metric)", Manufacturer="AVX Corporation", Operating Temperature="-55°C ~ 85°C", Supplier Part Number 1=478-10179-1-ND, Temperature Coefficient=X5R, Tolerance=±10%, Voltage - Rated=16V, Applications="General Purpose", Capacitance=1µF, ComponentLink1Description=Datasheet, ComponentLink1URL=http://datasheets.avx.com/cx5r.pdf, ComponentLink2Description="DigiKey Link", ComponentLink2URL=http://digikey.com/product-detail/en/avx-corporation/0402YD105KAT2A/478-10179-1-ND/6797606, LastUpdated="2/9/2020 1:02:22 AM", Lifecycle Status=Active, Minimum Order=1, Mounting Type="Surface Mount, MLCC", Package / Case="0402 (1005 Metric)", Packaging=TapeAndReel, Part Number=0402YD105KAT2A, Part Status=Active, PartId=2859, Price=0.07, Series=-, Size / Dimension="0.039\" L x 0.020\" W (1.00mm x 0.50mm)", Supplier 1=DigiKey, Thickness (Max)="0.022\" (0.55mm)"
C3 C32 C33: library part GRM32EC70J107ME15L, "Capacitor", Manufacturer_Name="Murata Electronics", Mouser2 Part Number=81-GRM32EC70J107ME5L, Datasheet Link=https://componentsearchengine.com//GRM32EC70J107ME15L.pdf, Height=2.7mm, Manufacturer_Part_Number=GRM32EC70J107ME15L, Mouser2 Price/Stock=https://www.mouser.com/Search/Refine.aspx?Keyword=81-GRM32EC70J107ME5L
C4 C6 C7 C9 C21 C22 C24 C25 C26 C27 C29 C34 C35 C36 C37 C40 C42: library part C0402C104K9PACTU, "CAP CER 0.1UF 6.3V X5R 0402", Device Package="0402 (1005 Metric)", Manufacturer=KEMET, Operating Temperature="-55°C ~ 85°C", Supplier Part Number 1=399-3026-1-ND, Temperature Coefficient=X5R, Tolerance=±10%, Voltage - Rated=6.3V, Applications="General Purpose", Capacitance=0.1µF, ComponentLink1Description=Datasheet, ComponentLink1URL=https://api.kemet.com/component-edge/download/datasheet/C0402C104K9PACTU.pdf, ComponentLink2Description="DigiKey Link", ComponentLink2URL=http://digikey.com/product-detail/en/kemet/C0402C104K9PACTU/399-3026-1-ND/447602, LastUpdated="2/9/2020 1:01:34 AM", Lifecycle Status=Active, Minimum Order=1, Mounting Type="Surface Mount, MLCC", Package / Case="0402 (1005 Metric)", Packaging=TapeAndReel, Part Number=C0402C104K9PACTU, Part Status=Active, PartId=12742, Price=0.01, Series="SMD Comm X5R", Size / Dimension="0.039\" L x 0.020\" W (1.00mm x 0.50mm)", Supplier 1=DigiKey, Thickness (Max)="0.022\" (0.55mm)"
C8: library part C1005X5R1E474K050BE, "CAP CER 0.47UF 25V X5R 0402", Device Package="0402 (1005 Metric)", Manufacturer="TDK Corporation", Operating Temperature="-55°C ~ 85°C", Supplier Part Number 1=445-175217-1-ND, Temperature Coefficient=X5R, Tolerance=±10%, Voltage - Rated=25V, Applications="Boardflex Sensitive", Capacitance=0.47µF, ComponentLink1Description=Datasheet, ComponentLink1URL=https://product.tdk.com/info/en/catalog/datasheets/mlcc_commercial_soft_en.pdf?ref_disty=digikey, ComponentLink2Description="DigiKey Link", ComponentLink2URL=http://digikey.com/product-detail/en/tdk-corporation/C1005X5R1E474K050BE/445-175217-1-ND/7907781, Features="Soft Termination", LastUpdated="2/9/2020 1:01:22 AM", Lifecycle Status=Active, Minimum Order=1, Mounting Type="Surface Mount, MLCC", Package / Case="0402 (1005 Metric)", Packaging=TapeAndReel, Part Number=C1005X5R1E474K050BE, Part Status=Active, PartId=13175, Price=0.02, Series=C, Size / Dimension="0.039\" L x 0.020\" W (1.00mm x 0.50mm)", Supplier 1=DigiKey, Thickness (Max)="0.024\" (0.60mm)"
C10 C13: library part C2012X6S1C226M125AC, "CAP CER 22UF 16V X6S 0805", Device Package="0805 (2012 Metric)", Manufacturer="TDK Corporation", Operating Temperature="-55°C ~ 105°C", Supplier Part Number 1=445-14486-1-ND, Temperature Coefficient=X6S, Tolerance=±20%, Voltage - Rated=16V, Applications="General Purpose", Capacitance=22µF, ComponentLink1Description=Datasheet, ComponentLink1URL=https://product.tdk.com/info/en/catalog/datasheets/mlcc_commercial_general_en.pdf?ref_disty=digikey, ComponentLink2Description="DigiKey Link", ComponentLink2URL=http://digikey.com/product-detail/en/tdk-corporation/C2012X6S1C226M125AC/445-14486-1-ND/3956152, Features="Low ESL", LastUpdated="2/9/2020 1:04:25 AM", Lifecycle Status=Active, Minimum Order=1, Mounting Type="Surface Mount, MLCC", Package / Case="0805 (2012 Metric)", Packaging=TapeAndReel, Part Number=C2012X6S1C226M125AC, Part Status=Active, PartId=11672, Price=0.19, Series=C, Size / Dimension="0.079\" L x 0.049\" W (2.00mm x 1.25mm)", Supplier 1=DigiKey, Thickness (Max)="0.057\" (1.45mm)"
C12 C15: library part CC0402KRX7R8BB183, "CAP CER 0.018UF 25V X7R 0402", Device Package="0402 (1005 Metric)", Manufacturer=Yageo, Operating Temperature="-55°C ~ 125°C", Supplier Part Number 1=311-3345-1-ND, Temperature Coefficient=X7R, Tolerance=±10%, Voltage - Rated=25V, Applications="General Purpose", Capacitance=0.018µF, ComponentLink1Description=Datasheet, ComponentLink1URL=https://www.yageo.com/upload/media/product/productsearch/datasheet/mlcc/UPY-GPHC_X7R_6.3V-to-50V_18.pdf, ComponentLink2Description="DigiKey Link", ComponentLink2URL=http://digikey.com/product-detail/en/yageo/CC0402KRX7R8BB183/311-3345-1-ND/6818315, LastUpdated="2/9/2020 1:02:03 AM", Lifecycle Status=Active, Minimum Order=1, Mounting Type="Surface Mount, MLCC", Package / Case="0402 (1005 Metric)", Packaging=TapeAndReel, Part Number=CC0402KRX7R8BB183, Part Status=Active, PartId=11317, Price=0.01, Series=CC, Size / Dimension="0.039\" L x 0.020\" W (1.00mm x 0.50mm)", Supplier 1=DigiKey, Thickness (Max)="0.022\" (0.55mm)"
C20 C28: library part 0402B103K500CT, "CAP CER 10000PF 50V X7R 0402", Device Package="0402 (1005 Metric)", Manufacturer="Walsin Technology Corporation", Operating Temperature="-55°C ~ 125°C", Supplier Part Number 1=1292-1628-1-ND, Temperature Coefficient=X7R, Tolerance=±10%, Voltage - Rated=50V, Applications="General Purpose", Capacitance=10000pF, ComponentLink1Description=Datasheet, ComponentLink1URL=http://www.passivecomponent.com/wp-content/uploads/2018/10/MLCC.pdf, ComponentLink2Description="DigiKey Link", ComponentLink2URL=http://digikey.com/product-detail/en/walsin-technology-corporation/0402B103K500CT/1292-1628-1-ND/9355632, LastUpdated="2/9/2020 1:02:02 AM", Lifecycle Status=Active, Minimum Order=1, Mounting Type="Surface Mount, MLCC", Package / Case="0402 (1005 Metric)", Packaging=CutTape, Part Number=0402B103K500CT, Part Status=Active, PartId=11631, Price=0.10, Series=-, Size / Dimension="0.039\" L x 0.020\" W (1.00mm x 0.50mm)", Supplier 1=DigiKey, Thickness (Max)="0.022\" (0.55mm)"
C23: library part 0402B222K500CT, "CAP CER 2200PF 50V X7R 0402", Device Package="0402 (1005 Metric)", Manufacturer="Walsin Technology Corporation", Operating Temperature="-55°C ~ 125°C", Supplier Part Number 1=1292-1193-1-ND, Temperature Coefficient=X7R, Tolerance=±10%, Voltage - Rated=50V, Applications="General Purpose", Capacitance=2200pF, ComponentLink1Description=Datasheet, ComponentLink1URL=http://www.passivecomponent.com/wp-content/uploads/2018/10/MLCC.pdf, ComponentLink2Description="DigiKey Link", ComponentLink2URL=http://digikey.com/product-detail/en/walsin-technology-corporation/0402B222K500CT/1292-1193-1-ND/9355197, LastUpdated="2/9/2020 1:02:01 AM", Lifecycle Status=Active, Minimum Order=1, Mounting Type="Surface Mount, MLCC", Package / Case="0402 (1005 Metric)", Packaging=TapeAndReel, Part Number=0402B222K500CT, Part Status=Active, PartId=11799, Price=0.01, Series=-, Size / Dimension="0.039\" L x 0.020\" W (1.00mm x 0.50mm)", Supplier 1=DigiKey, Thickness (Max)="0.022\" (0.55mm)"
C41: library part 0402N100G500CT, "CAP CER 10PF 50V C0G/NP0 0402", Device Package="0402 (1005 Metric)", Manufacturer="Walsin Technology Corporation", Operating Temperature="-55°C ~ 125°C", Supplier Part Number 1=1292-1237-1-ND, Temperature Coefficient="C0G, NP0", Tolerance=±2%, Voltage - Rated=50V, Applications="General Purpose", Capacitance=10pF, ComponentLink1Description=Datasheet, ComponentLink1URL=http://www.passivecomponent.com/wp-content/uploads/2018/10/MLCC.pdf, ComponentLink2Description="DigiKey Link", ComponentLink2URL=http://digikey.com/product-detail/en/walsin-technology-corporation/0402N100G500CT/1292-1237-1-ND/9355241, LastUpdated="2/9/2020 1:02:04 AM", Lifecycle Status=Active, Minimum Order=1, Mounting Type="Surface Mount, MLCC", Package / Case="0402 (1005 Metric)", Packaging=TapeAndReel, Part Number=0402N100G500CT, Part Status=Active, PartId=10726, Price=0.01, Series=-, Size / Dimension="0.039\" L x 0.020\" W (1.00mm x 0.50mm)", Supplier 1=DigiKey, Thickness (Max)="0.022\" (0.55mm)"
C43: "Capacitor", Manufacturer_Name="TAIYO YUDEN", Datasheet Link=https://componentsearchengine.com/Datasheets/2/F6QA1G581M2QZ-J.pdf, Height=0.5mm, Manufacturer_Part_Number=F6QA1G581M2QZ-J
D1: "Schottky Diode", Manufacturer_Name=Nexperia, Datasheet Link=https://datasheet.datasheetarchive.com/originals/distributors/Datasheets_SAMA/fa882cf4aa6eed6383790f96e9182165.pdf, Height=1mm, Manufacturer_Part_Number=PMEG3050EP,115
F1: "Fuse", Manufacturer_Name=Bourns, Manufacturer_Part_Number=MF-NSML350/12-2, Datasheet Link=https://componentsearchengine.com/Datasheets/1/MF-NSML350_12-2.pdf, Height=1.4mm
FB1 FB2 FB3 FB4 FB5 FB6 FB7 FB8 FB9 FB10 FB11 FB12 FB13 FB14 FB15 FB16 FB17 FB18 FB19 FB20: "Ferrite Bead", Manufacturer_Name=Eaton, Manufacturer_Part_Number=MFBM1V1005-101-R, Assembly Instruction=DNP, Datasheet Link=https://www.mouser.in/datasheet/2/87/eaton_mfbm1v1005_high_current_multilayer_ferrite_c-1890673.pdf, Height=0.65mm
FL1 FL2 FL3 FL5 FL6 FL7 FL8 FL9 FL10 FL13 FL14 FL15 FL17 FL18: "Filter", Manufacturer_Name=TDK
  FL1 FL2 FL3 FL5: Assembly Instruction=DNP, Datasheet Link=https://product.tdk.com/system/files/dam/doc/product/emc/emc/cmf_cmc/catalog/cmf_commercial_signal_tcm0605m_en.pdf, Height=0.35mm, Manufacturer_Part_Number=TCM0605M-650-2P-T201
  FL6 FL7 FL8 FL9 FL10 FL13 FL14 FL15 FL17 FL18: Datasheet Link=https://product.tdk.com/system/files/dam/doc/product/emc/emc/3tf/catalog/3tf_commercial_signal_mem1608p_en.pdf, Height=0.7mm, Manufacturer_Part_Number=MEM1608P35R0T001
FL4: "Filter", Manufacturer_Name="Murata Electronics", Mouser2 Part Number=81-DLW5ATN112MQ2L, Datasheet Link=https://componentsearchengine.com//DLW5ATN112MQ2L.pdf, Height=2.35mm, Manufacturer_Part_Number=DLW5ATN112MQ2L, Mouser2 Price/Stock=https://www.mouser.com/Search/Refine.aspx?Keyword=81-DLW5ATN112MQ2L
FL11 FL12: "Filter", Manufacturer_Name=Mini-Circuits, Datasheet Link=https://www.minicircuits.com/pdfs/LFCN-160+.pdf, Height=0.94mm, Manufacturer_Part_Number=LFCN-160+
FM1 FM2 FM3 FM4 FM5 FM6: library part Fiducial_Mark, "Fiducial mark, width 1mm, clearance 3mm", Clearance="3 mm", Width="1 mm"
IC1: "Integrated Circuit", Manufacturer_Name="Texas Instruments", Datasheet Link=https://www.ti.com/lit/ds/symlink/bq2961.pdf?ts=1629467003310&ref_url=https%253A%252F%252Fwww.ti.com%252Fstore%252Fti%252Fen%252Fp%252Fproduct%252F%253Fp%253DBQ296106DSGT, Height=0.8mm, Manufacturer_Part_Number=BQ296106DSGT
IC2: "Integrated Circuit", Manufacturer_Name="Maxim Integrated", Datasheet Link=https://pdfserv.maximintegrated.com/en/ds/MAX2686L-MAX2693L.pdf, Height=0.69mm, Manufacturer_Part_Number=MAX2693LEWS+T
IC3: "Integrated Circuit", Manufacturer_Name=U-Blox, Datasheet Link=https://www.u-blox.com/sites/default/files/MAX-M8-FW3_DataSheet_%28UBX-15031506%29.pdf, Manufacturer_Part_Number=MAX-M8Q-0-10
J1: "CONN HEADER VERT 3POS 2.5MM", Current Rating (Amps)=3A, Insulation Color=Natural, Manufacturer="JST Sales America Inc.", Material Flammability Rating="UL94 V-0", Operating Temperature="-25°C ~ 85°C", Supplier Part Number 1=455-2248-ND, Voltage Rating=250V, ComponentLink1Description=Datasheet, ComponentLink1URL=http://www.jst-mfg.com/product/pdf/eng/eXH.pdf, ComponentLink2Description="DigiKey Link", ComponentLink2URL=http://digikey.com/product-detail/en/jst-sales-america-inc/B3B-XH-A-LF-SN/455-2248-ND/1651046, Connector Type=Header, Contact Finish - Mating=Tin, Contact Finish - Post=Tin, Contact Length - Post="0.134\" (3.40mm)", Contact Material=Brass, Contact Shape=Square, Contact Type="Male Pin", Fastening Type="Detent Lock", Insulation Height="0.276\" (7.00mm)", Insulation Material="Polyamide (PA66), Nylon 6/6", LastUpdated="12/1/2020 11:46:22 PM", Lifecycle Status=Active, Minimum Order=1, Mounting Type="Through Hole", Number of Positions=3, Number of Positions Loaded=All, Number of Rows=1, Packaging=Bulk, Part Number=B3B-XH-A(LF)(SN), Part Status=Active, PartId=68, Pitch - Mating="0.098\" (2.50mm)", Price=0.19, Series=XH, Shrouding="Shrouded - 4 Wall", Style="Board to Cable/Wire", Supplier 1=DigiKey, Termination="Press-Fit, Solder"
J2 J3: "Connector", Manufacturer_Name="Linx Technologies", Mouser2 Part Number=712-CONUFL001-SMD-T, Datasheet Link=https://componentsearchengine.com//CONUFL001-SMD-T.pdf, Manufacturer_Part_Number=CONUFL001-SMD-T, Mouser2 Price/Stock=https://www.mouser.com/Search/Refine.aspx?Keyword=712-CONUFL001-SMD-T
L1: library part 7447840112G, "Inductor", Manufacturer_Name="Wurth Elektronik", Datasheet Link=https://www.mouser.sg/datasheet/2/445/7447840112G-2492224.pdf, Height=0.55mm, Manufacturer_Part_Number=7447840112G
P1 P4: "Header, 6-Pin", LatestRevisionDate=17-Jul-2002, LatestRevisionNote="Re-released for DXP Platform.", Publisher="Altium Limited"
P2: "Header, 3-Pin", LatestRevisionDate=17-Jul-2002, LatestRevisionNote="Re-released for DXP Platform.", Publisher="Altium Limited"
P3 P6: "Header, 4-Pin", LatestRevisionDate=17-Jul-2002, LatestRevisionNote="Re-released for DXP Platform.", Publisher="Altium Limited"
P5: "Header, 2-Pin", LatestRevisionDate=17-Jul-2002, LatestRevisionNote="Re-released for DXP Platform.", Publisher="Altium Limited"
PS1 PS2: "Power Supply", Manufacturer_Name=ABB, Datasheet Link=https://www.mouser.sg/datasheet/2/167/APTS003A0X-1920083.pdf, Height=6.25mm, Manufacturer_Part_Number=APXS003A0X-SRZ
Q1: "MOSFET (P-Channel)", Manufacturer_Name=Nexperia, Datasheet Link=https://www.mouser.in/datasheet/2/916/PMN30XPA-1839888.pdf, Height=1.1mm, Manufacturer_Part_Number=PMN30XPAX
Q2: "Transistor", Manufacturer_Name=Nexperia, Datasheet Link=https://ms.componentsearchengine.com/Datasheets/2/PMGD290UCEAX.pdf, Height=1.1mm, Manufacturer_Part_Number=PMGD290UCEAX
Q3: "MOSFET (N-Channel)", Manufacturer_Name=Nexperia, Datasheet Link=https://componentsearchengine.com/Datasheets/2/PMV37ENEAR.pdf, Height=1.1mm, Manufacturer_Part_Number=PMV37ENEAR
R1 R2 R5 R16 R19 R25 R26: library part CRCW04024K70JNEDC, "RES SMD 4.7K OHM 5% 1/16W 0402", Device Package="0402 (1005 Metric)", Manufacturer="Vishay Dale", Operating Temperature="-55°C ~ 155°C", Power (Watts)="0.063W, 1/16W", Supplier Device Package=0402, Supplier Part Number 1=541-3974-1-ND, Temperature Coefficient=±200ppm/°C, Tolerance=±5%, ComponentLink1Description=Datasheet, ComponentLink1URL=http://www.vishay.com/docs/28773/crcwce3.pdf, ComponentLink2Description="DigiKey Link", ComponentLink2URL=http://digikey.com/product-detail/en/vishay-dale/CRCW04024K70JNEDC/541-3974-1-ND/7928657, Composition="Thick Film", Height - Seated (Max)="0.014\" (0.35mm)", LastUpdated="2/9/2020 1:07:41 AM", Lifecycle Status=Active, Minimum Order=1, Number of Terminations=2, Package / Case="0402 (1005 Metric)", Packaging=CutTape, Part Number=CRCW04024K70JNEDC, Part Status=Active, PartId=15960, Price=0.10, Resistance="4.7 kOhms", Series=CRCW-C, Size / Dimension="0.039\" L x 0.020\" W (1.00mm x 0.50mm)", Supplier 1=DigiKey
  R5: Assembly Instruction=DNP
R3 R4: library part AC0402FR-07100KL, "RES SMD 100K OHM 1% 1/16W 0402", Device Package="0402 (1005 Metric)", Manufacturer=Yageo, Operating Temperature="-55°C ~ 155°C", Power (Watts)="0.063W, 1/16W", Ratings=AEC-Q200, Supplier Device Package=0402, Supplier Part Number 1=YAG3434CT-ND, Temperature Coefficient=±100ppm/°C, Tolerance=±1%, ComponentLink1Description=Datasheet, ComponentLink1URL=https://www.yageo.com/upload/media/product/productsearch/datasheet/rchip/PYu-AC_51_RoHS_L_7.pdf, ComponentLink2Description="DigiKey Link", ComponentLink2URL=http://digikey.com/product-detail/en/yageo/AC0402FR-07100KL/YAG3434CT-ND/6006283, Composition="Thick Film", Features="Automotive AEC-Q200, Moisture Resistant", Height - Seated (Max)="0.015\" (0.37mm)", LastUpdated="2/9/2020 1:07:50 AM", Lifecycle Status=Active, Minimum Order=1, Number of Terminations=2, Package / Case="0402 (1005 Metric)", Packaging=CutTape, Part Number=AC0402FR-07100KL, Part Status=Active, PartId=12047, Price=0.10, Resistance="100 kOhms", Series=AC, Size / Dimension="0.039\" L x 0.020\" W (1.00mm x 0.50mm)", Supplier 1=DigiKey
R6 R15 R21: library part CRG0402F100R, "RES SMD 100 OHM 1% 1/16W 0402", Device Package="0402 (1005 Metric)", Manufacturer="TE Connectivity Passive Product", Operating Temperature="-55°C ~ 155°C", Power (Watts)="0.063W, 1/16W", Supplier Device Package=0402, Supplier Part Number 1=A121527CT-ND, Temperature Coefficient=±100ppm/°C, Tolerance=±1%, ComponentLink1Description=Datasheet, ComponentLink1URL=https://www.te.com/commerce/DocumentDelivery/DDEController?Action=srchrtrv&DocNm=1773204&DocType=DS&DocLang=English, ComponentLink2Description="DigiKey Link", ComponentLink2URL=http://digikey.com/product-detail/en/te-connectivity-passive-product/CRG0402F100R/A121527CT-ND/5246516, Composition="Thick Film", Height - Seated (Max)="0.016\" (0.40mm)", LastUpdated="2/9/2020 1:07:28 AM", Lifecycle Status=Active, Minimum Order=1, Number of Terminations=2, Package / Case="0402 (1005 Metric)", Packaging=CutTape, Part Number=CRG0402F100R, Part Status=Active, PartId=20718, Price=0.10, Resistance="100 Ohms", Series="CRG, Neohm", Size / Dimension="0.039\" L x 0.020\" W (1.00mm x 0.50mm)", Supplier 1=DigiKey
R7 R10 R11: library part CRCW04021K00FKEDC, "RES SMD 1K OHM 1% 1/16W 0402", Device Package="0402 (1005 Metric)", Manufacturer="Vishay Dale", Operating Temperature="-55°C ~ 155°C", Power (Watts)="0.063W, 1/16W", Supplier Device Package=0402, Supplier Part Number 1=541-3961-1-ND, Temperature Coefficient=±100ppm/°C, Tolerance=±1%, ComponentLink1Description=Datasheet, ComponentLink1URL=http://www.vishay.com/docs/28773/crcwce3.pdf, ComponentLink2Description="DigiKey Link", ComponentLink2URL=http://digikey.com/product-detail/en/vishay-dale/CRCW04021K00FKEDC/541-3961-1-ND/7928644, Composition="Thick Film", Height - Seated (Max)="0.014\" (0.35mm)", LastUpdated="2/9/2020 1:07:49 AM", Lifecycle Status=Active, Minimum Order=1, Number of Terminations=2, Package / Case="0402 (1005 Metric)", Packaging=CutTape, Part Number=CRCW04021K00FKEDC, Part Status=Active, PartId=12669, Price=0.10, Resistance="1 kOhms", Series=CRCW-C, Size / Dimension="0.039\" L x 0.020\" W (1.00mm x 0.50mm)", Supplier 1=DigiKey
R8 R12 R14 R17 R18 R27: library part CPF0402B10KE1, "RES SMD 10K OHM 0.1% 1/16W 0402", Device Package="0402 (1005 Metric)", Manufacturer="TE Connectivity Passive Product", Operating Temperature="-55°C ~ 155°C", Power (Watts)="0.063W, 1/16W", Supplier Device Package=0402, Supplier Part Number 1=A102579CT-ND, Temperature Coefficient=±25ppm/°C, Tolerance=±0.1%, ComponentLink1Description=Datasheet, ComponentLink1URL=https://www.te.com/commerce/DocumentDelivery/DDEController?Action=srchrtrv&DocNm=1773200&DocType=DS&DocLang=English, ComponentLink2Description="DigiKey Link", ComponentLink2URL=http://digikey.com/product-detail/en/te-connectivity-passive-product/CPF0402B10KE1/A102579CT-ND/2729112, Composition="Thin Film", Height - Seated (Max)="0.014\" (0.35mm)", LastUpdated="2/9/2020 1:07:41 AM", Lifecycle Status=Active, Minimum Order=1, Number of Terminations=2, Package / Case="0402 (1005 Metric)", Packaging=TapeAndReel, Part Number=CPF0402B10KE1, Part Status=Active, PartId=15889, Price=0.13, Resistance="10 kOhms", Series="CPF, Neohm", Size / Dimension="0.039\" L x 0.020\" W (1.00mm x 0.50mm)", Supplier 1=DigiKey
R9 R29: library part ERJ-2GEJ6R8X, "RES SMD 6.8 OHM 5% 1/10W 0402", Device Package="0402 (1005 Metric)", Manufacturer="Panasonic Electronic Components", Operating Temperature="-55°C ~ 155°C", Power (Watts)="0.1W, 1/10W", Ratings=AEC-Q200, Supplier Device Package=0402, Supplier Part Number 1=P6.8JCT-ND, Temperature Coefficient="-100/ +600ppm/°C", Tolerance=±5%, ComponentLink1Description=Datasheet, ComponentLink1URL=https://b2b-api.panasonic.eu/file_stream/pids/fileversion/1242, ComponentLink2Description="DigiKey Link", ComponentLink2URL=http://digikey.com/product-detail/en/panasonic-electronic-components/ERJ-2GEJ6R8X/P6.8JCT-ND/282384, Composition="Thick Film", Features="Automotive AEC-Q200", Height - Seated (Max)="0.016\" (0.40mm)", LastUpdated="2/9/2020 1:08:02 AM", Lifecycle Status=Active, Minimum Order=1, Number of Terminations=2, Package / Case="0402 (1005 Metric)", Packaging=CutTape, Part Number=ERJ-2GEJ6R8X, Part Status=Active, PartId=6342, Price=0.10, Resistance="6.8 Ohms", Series=ERJ, Size / Dimension="0.039\" L x 0.020\" W (1.00mm x 0.50mm)", Supplier 1=DigiKey
R13 R20 R28: library part CPF0402B2K2E1, "RES SMD 2.2K OHM 0.1% 1/16W 0402", Device Package="0402 (1005 Metric)", Manufacturer="TE Connectivity Passive Product", Operating Temperature="-55°C ~ 155°C", Power (Watts)="0.063W, 1/16W", Supplier Device Package=0402, Supplier Part Number 1=A102766CT-ND, Temperature Coefficient=±25ppm/°C, Tolerance=±0.1%, ComponentLink1Description=Datasheet, ComponentLink1URL=https://www.te.com/commerce/DocumentDelivery/DDEController?Action=srchrtrv&DocNm=1773200&DocType=DS&DocLang=English, ComponentLink2Description="DigiKey Link", ComponentLink2URL=http://digikey.com/product-detail/en/te-connectivity-passive-product/CPF0402B2K2E1/A102766CT-ND/2729299, Composition="Thin Film", Height - Seated (Max)="0.014\" (0.35mm)", LastUpdated="2/9/2020 1:08:09 AM", Lifecycle Status=Active, Minimum Order=1, Number of Terminations=2, Package / Case="0402 (1005 Metric)", Packaging=TapeAndReel, Part Number=CPF0402B2K2E1, Part Status=Active, PartId=3342, Price=0.14, Resistance="2.2 kOhms", Series="CPF, Neohm", Size / Dimension="0.039\" L x 0.020\" W (1.00mm x 0.50mm)", Supplier 1=DigiKey
R22 R23: library part CRCW04020000Z0ED, "RES SMD 0 OHM JUMPER 1/16W 0402", Device Package="0402 (1005 Metric)", Manufacturer="Vishay Dale", Operating Temperature="-55°C ~ 155°C", Power (Watts)="0.063W, 1/16W", Ratings=AEC-Q200, Supplier Device Package=0402, Supplier Part Number 1=541-0.0JCT-ND, Tolerance=Jumper, ComponentLink1Description=Datasheet, ComponentLink1URL=http://www.vishay.com/docs/20035/dcrcwe3.pdf, ComponentLink2Description="DigiKey Link", ComponentLink2URL=http://digikey.com/product-detail/en/vishay-dale/CRCW04020000Z0ED/541-0.0JCT-ND/1182611, Composition="Thick Film", Features="Automotive AEC-Q200", Height - Seated (Max)="0.016\" (0.40mm)", LastUpdated="2/9/2020 1:07:36 AM", Lifecycle Status=Active, Minimum Order=1, Number of Terminations=2, Package / Case="0402 (1005 Metric)", Packaging=CutTape, Part Number=CRCW04020000Z0ED, Part Status=Active, PartId=17634, Price=0.10, Series=CRCW, Size / Dimension="0.039\" L x 0.020\" W (1.00mm x 0.50mm)", Supplier 1=DigiKey
  R23: Assembly Instruction=DNP
R24: library part AC0402FR-0725K5L, "RES SMD 25.5K OHM 1% 1/16W 0402", Device Package="0402 (1005 Metric)", Manufacturer=Yageo, Operating Temperature="-55°C ~ 155°C", Power (Watts)="0.063W, 1/16W", Ratings=AEC-Q200, Supplier Device Package=0402, Supplier Part Number 1=YAG5657CT-ND, Temperature Coefficient=±100ppm/°C, Tolerance=±1%, ComponentLink1Description=Datasheet, ComponentLink1URL=https://www.yageo.com/upload/media/product/productsearch/datasheet/rchip/PYu-AC_51_RoHS_L_7.pdf, ComponentLink2Description="DigiKey Link", ComponentLink2URL=http://digikey.com/product-detail/en/yageo/AC0402FR-0725K5L/YAG5657CT-ND/7563677, Composition="Thick Film", Features="Automotive AEC-Q200, Moisture Resistant", Height - Seated (Max)="0.015\" (0.37mm)", LastUpdated="2/9/2020 1:07:41 AM", Lifecycle Status=Active, Minimum Order=1, Number of Terminations=2, Package / Case="0402 (1005 Metric)", Packaging=CutTape, Part Number=AC0402FR-0725K5L, Part Status=Active, PartId=15874, Price=0.10, Resistance="25.5 kOhms", Series=AC, Size / Dimension="0.039\" L x 0.020\" W (1.00mm x 0.50mm)", Supplier 1=DigiKey
U1: "Bluetooth, WiFi 802.11b/g/n, Bluetooth v4.2 + EDR, Class 1, 2 and 3 Transceiver Module 2.4GHz ~ 2.5GHz Integrated, Trace Surface Mount", Package="Module Espressif Systems", Availability=Unavailable, MF="Espressif Systems", MP=ESP32-WROOM-32D, Price=None, SnapEDA_Link=https://www.snapeda.com/parts/ESP32-WROOM-32D/Espressif%20Systems/view-part/2768115/?ref=snap
U2: "Accelerometer, Gyroscope, 6 Axis Sensor IÂ²C Output", Package="VFQFN-24 TDK InvenSense", Availability=Unavailable, MF="TDK InvenSense", MP=MPU-6050, Price=None, SnapEDA_Link=https://www.snapeda.com/parts/MPU-6050/TDK%20InvenSense/view-part/4503180/?ref=snap
U3 U4: "Pressure Sensor 4.35PSI ~ 18.13PSI _30kPa ~ 125kPa_ Absolute 10-WFLGA", Package="WFLGA-10 Bosch Tools", Digi-Key_Part_Number=828-1079-1-ND, Digi-Key_Purchase_URL=https://www.digikey.com/product-detail/en/bosch-sensortec/BMP388/828-1079-1-ND/8322640?utm_source=snapeda&utm_medium=aggregator&utm_campaign=symbol, MF="Bosch Sensortec", MP=BMP388, SnapEDA_Link=https://www.snapeda.com/parts/BMP388/Bosch%20Sensortec/view-part/2747857/?ref=snap
U5: "VHF Band Voice Transceiver Module", Package=Package, Availability=Unavailable, Check_prices=https://www.snapeda.com/parts/DRA818V/DORJI/view-part/2654524/?ref=eda, MF=DORJI, MP=DRA818V, Price=None, SnapEDA_Link=https://www.snapeda.com/parts/DRA818V/DORJI/view-part/2654524/?ref=snap

## Via types
v1: diameter 0.6, hole 0.3, Top Layer to Bottom Layer, tented both sides, 382 vias

## Nets (pads, with @x,y where several pads share a name; then routed paths per layer and width w, separated by ;. In a path a pad name is that pad's centre, name@x,y a point inside that pad or via, vN(x,y) a via of type N, cw(c..) or ccw(c..) an arc to the next point about the centre after c; other vN are vias at no path point)
BATT_C1: J1.2 R11.1 R16.2 | length 12.7
  Top Layer w0.305: R16.2@62.932,32.004 62.992,32.064 J1.2@62.992,35.179 J1.2@62.932,35.119
  Layer 1 w0.305: v1(56.515,32.131) 57.785,33.401 61.214,33.401 J1.2@62.992,35.179
  Bottom Layer w0.305: R11.1@54.931,32.131 v1(56.515,32.131) ; J1.2@62.932,35.119 J1.2@62.992,35.179
BATT_C2: J1.1 Q1.4 R6.2 R7.1 R8.1 R17.1 | length 13
  Top Layer w0.305: J1.1@65.472,35.159 J1.1@65.492,35.179
  Bottom Layer w0.305: R6.2@57.912,34.858 57.912,33.408 R7.1@57.919,33.401 63.714,33.401 J1.1@65.492,35.179 65.492,32.024 R17.1@65.472,32.004
BATT_GND: C6.2 C8.1 C9.1 FL4.4 FL4.8 IC1.6 IC1.9 J1.3 Q2.1 Q3.2 R12.2 R14.2 R18.2 R19.1 | length 24.9
  Top Layer w0.305: R12.2@48.962,39.243 48.962,36.918 49.035,36.845 Q2.1@49.088,36.845 49.161,36.772 49.715,36.772 50.038,36.449 50.038,35.052 50.8,34.29 52.07,34.29 53.086,35.306 v1(54.356,35.306) 60.365,35.306 J1.3@60.492,35.179 58.988,33.675 R18.2@58.988,32.004 v1(57.912,32.004)